# Altium PCB LED_Matrix.PcbDoc (part 2 of 2)
Units mil, origin at the board's own origin, x right, y up, seen from the top; angles counter-clockwise.
Board outline 11090 x 4405 mil, 2 copper layers (Top Layer, Bottom Layer); 184 components, 244 nets, 878 pads, 83 vias.
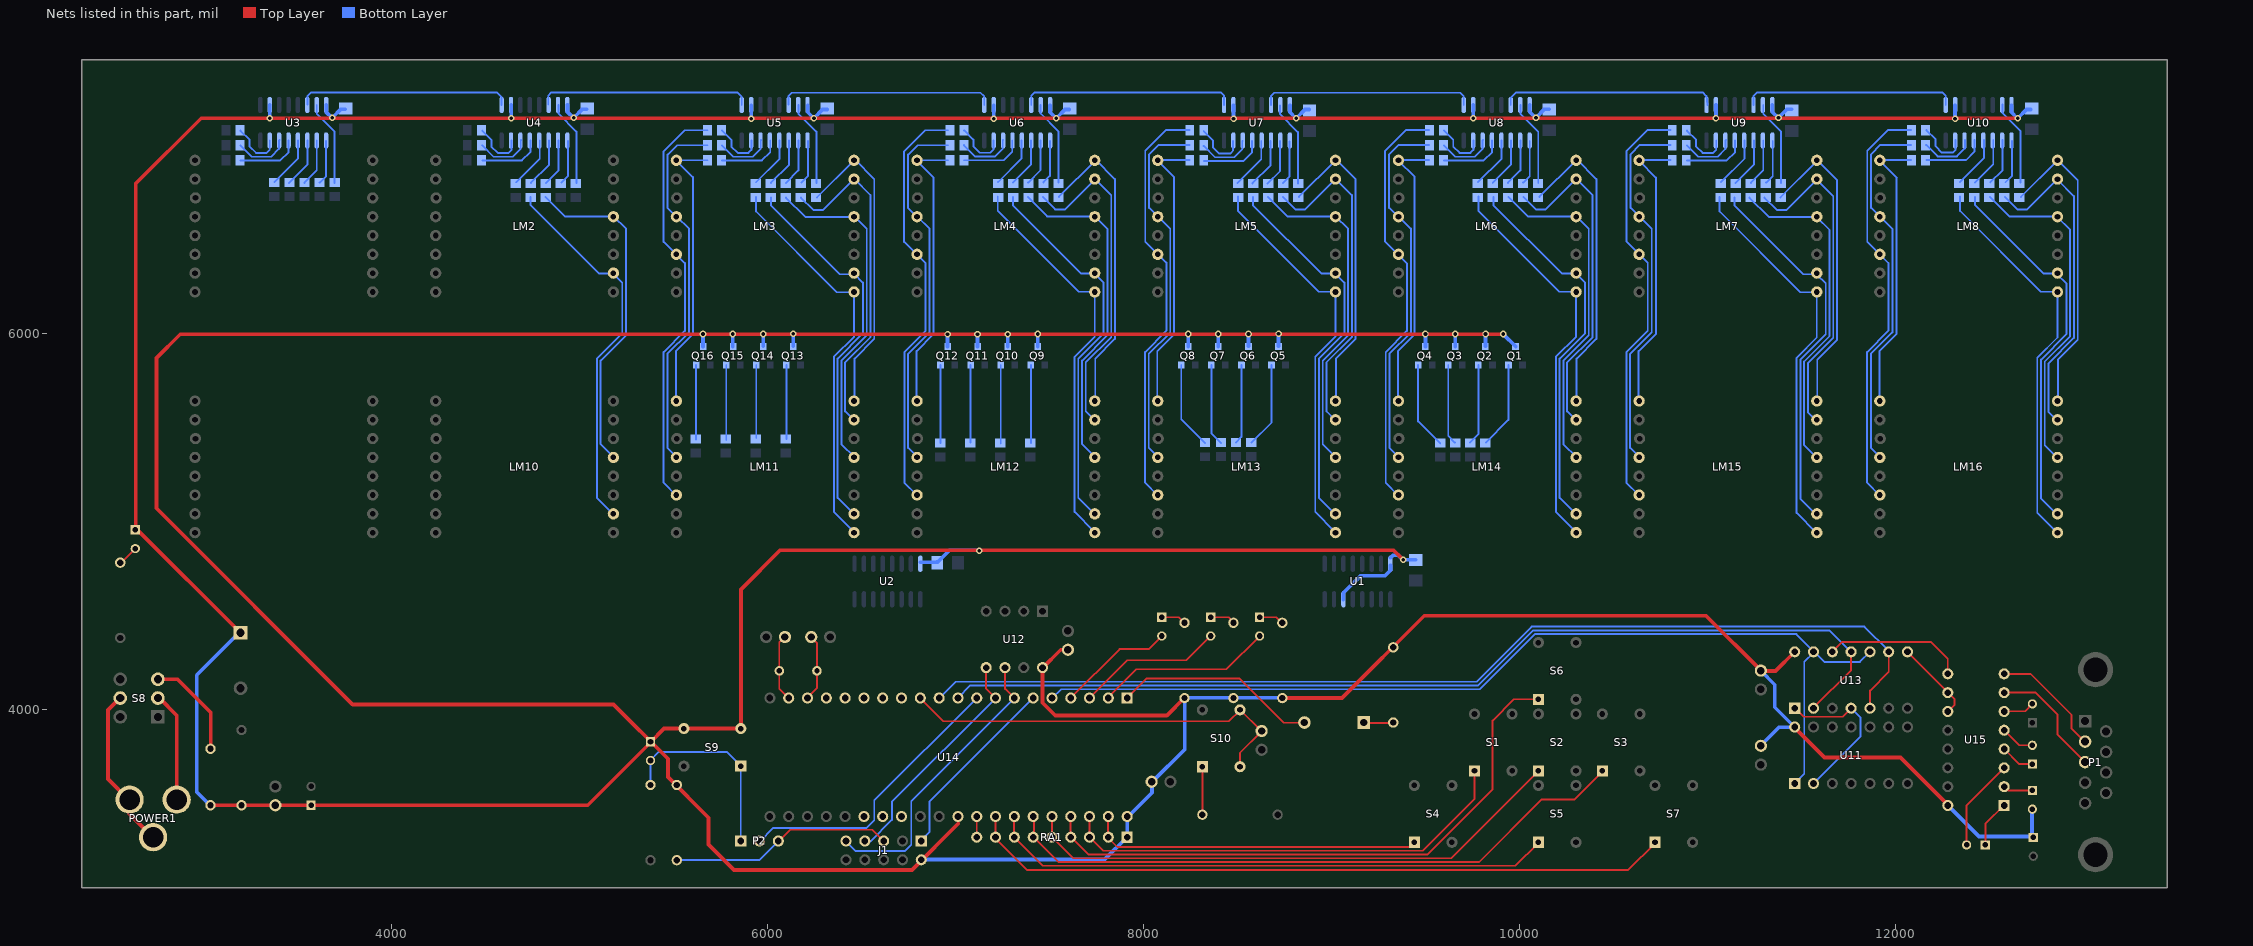
[diagram p2: the nets of this part, all layers, seen from the top]

## Via types
v1: diameter 35, hole 20, Top Layer to Bottom Layer, 79 vias
v2: diameter 314.96, hole 196.85, Top Layer to Bottom Layer, 4 vias

## Nets (pads, with @x,y where several pads share a name; then routed paths per layer and width w, separated by ;. In a path a pad name is that pad's centre, name@x,y a point inside that pad or via, vN(x,y) a via of type N, cw(c..) or ccw(c..) an arc to the next point about the centre after c; other vN are vias at no path point) (continued)
L15: LM2.2 LM10.2 R15.2 | length 2021.5
  Bottom Layer w10: R15.2@4742,6725 4742,6682 5107,6317 LM2.2@5181,6317 ; LM10.2@5180,5040 5095,5125 5095,5865 5230,6000 5230,6270 LM2.2@5182.52,6317.48
L16: LM2.5 LM10.5 R16.2 | length 1800
  Bottom Layer w10: R16.2@4821,6725 4924,6622 LM2.5@5183,6622 ; LM2.5@5182.52,6622.48 5250,6555 5250,5990 5115,5855 5115,5410 LM10.5@5185,5340
L17: LM3.9 LM11.9 R17.2 | length 1519.8
  Bottom Layer w10: LM11.9@5515,5640 5515,5905 5605,5995 5605,6831 ; LM3.9@5517,6921 5518,6920 R17.2@5684.6,6920 ; LM3.9@5517.64,6917.36 5605,6830
L18: LM3.14 LM11.14 R18.2 | length 2231.1
  Bottom Layer w10: LM11.14@5515,5140 5450,5205 5450,5900 5563,6013 5563,6373 5450,6486 5450,6968 5562,7080 R18.2@5684.6,7080 ; LM3.14@5517.64,6418.36 LM3.14@5517.64,6419.92
L19: LM3.8 LM11.8 R19.2 | length 1643.5
  Bottom Layer w10: R19.2@6265.5,6722.5 LM3.8@6461,6918 ; LM11.8@6465,5645 6465,5865 6570,5970 6570,6820 LM3.8@6465,6925
L20: LM3.12 LM11.12 R20.2 | length 1964.7
  Bottom Layer w10: LM3.12@5517.64,6619.92 5519.92,6619.92 5585,6554.84 5585,6005 5470,5890 5470,5390 LM11.12@5520,5340 ; LM3.12@5519,6617 5471,6665 5471,6950 5521,7000 R20.2@5684.6,7000
L21: LM3.1 LM11.1 R21.2 | length 2143.2
  Bottom Layer w10: R21.2@5941,6725 5941,6648 6371,6218 LM3.1@6463.52,6218 ; LM11.1@6460,4945 6355,5050 6355,5875 6462.52,5982.52 LM3.1@6462.52,6222.52
L22: LM3.7 LM11.7 R22.2 | length 1768.7
  Bottom Layer w10: R22.2@6180,6722 6246,6656 6299,6656 LM3.7@6461,6818 ; LM11.7@6460,5540 6415,5585 6415,5845 6550,5980 6550,6735 LM3.7@6462.52,6822.48
L23: LM3.2 LM11.2 R23.2 | length 2021.5
  Bottom Layer w10: R23.2@6021,6722 6021,6679 6386,6314 LM3.2@6460,6314 ; LM11.2@6460,5040 6375,5125 6375,5865 6510,6000 6510,6270 LM3.2@6462.52,6317.48
L24: LM3.5 LM11.5 R24.2 | length 1800
  Bottom Layer w10: R24.2@6100,6722 6203,6619 LM3.5@6462,6619 ; LM3.5@6462.52,6622.48 6530,6555 6530,5990 6395,5855 6395,5410 LM11.5@6465,5340
L25: LM4.9 LM12.9 R25.2 | length 1525.5
  Bottom Layer w10: LM12.9@6795,5640 6795,5905 6884.42,5994.42 6884.42,6828.58 6793,6920 R25.2@6963.6,6920
L26: LM4.14 LM12.14 R26.2 | length 2232.5
  Bottom Layer w10: LM12.14@6795,5140 6730,5205 6730,5900 6843,6013 6843,6372 6729,6486 6729,6968 6841,7080 R26.2@6963.6,7080 ; LM4.14@6797.64,6417.36 LM4.14@6797.64,6419.92
L27: LM4.8 LM12.8 R27.2 | length 1643.5
  Bottom Layer w10: R27.2@7551.5,6725.5 LM4.8@7747,6921 ; LM12.8@7745,5645 7745,5865 7850,5970 7850,6820 LM4.8@7745,6925
L28: LM4.12 LM12.12 R28.2 | length 1964.2
  Bottom Layer w10: LM4.12@6797.64,6619.92 6799.92,6619.92 6864.38,6555.47 6864.38,6004.38 6750,5890 6750,5390 LM12.12@6800,5340 ; LM4.12@6798,6617 6750,6665 6750,6950 6800,7000 R28.2@6963.6,7000
L29: LM4.1 LM12.1 R29.2 | length 2143.2
  Bottom Layer w10: R29.2@7227,6728 7227,6651 7657,6221 LM4.1@7749.52,6221 ; LM12.1@7740,4945 7635,5050 7635,5875 7742.52,5982.52 LM4.1@7742.52,6222.52
L30: LM4.7 LM12.7 R30.2 | length 1768.7
  Bottom Layer w10: R30.2@7466,6725 7532,6659 7585,6659 LM4.7@7747,6821 ; LM12.7@7740,5540 7695,5585 7695,5845 7830,5980 7830,6735 LM4.7@7742.52,6822.48
L31: LM4.2 LM12.2 R31.2 | length 2021.5
  Bottom Layer w10: R31.2@7307,6725 7307,6682 7672,6317 LM4.2@7746,6317 ; LM12.2@7740,5040 7655,5125 7655,5865 7790,6000 7790,6270 LM4.2@7742.52,6317.48
L32: LM4.5 LM12.5 R32.2 | length 1800
  Bottom Layer w10: R32.2@7386,6725 7489,6622 LM4.5@7748,6622 ; LM4.5@7742.52,6622.48 7810,6555 7810,5990 7675,5855 7675,5410 LM12.5@7745,5340
L33: LM5.9 LM13.9 R33.2 | length 1518.3
  Bottom Layer w10: LM13.9@8075,5640 8075,5905 8164.31,5994.31 8164.31,6830.69 LM5.9@8077.64,6917.36 ; LM5.9@8078,6923 8079,6922 R33.2@8245.6,6922
L34: LM5.14 LM13.14 R34.2 | length 2232.8
  Bottom Layer w10: LM13.14@8075,5140 8010,5205 8010,5900 8123.28,6013.28 8123.28,6375.72 8011,6488 8011,6970 8123,7082 R34.2@8245.6,7082 ; LM5.14@8077.64,6419.92 LM5.14@8079.08,6419.92
L35: LM5.8 LM13.8 R35.2 | length 1643.5
  Bottom Layer w10: R35.2@8828.5,6725.5 LM5.8@9024,6921 ; LM13.8@9025,5645 9025,5865 9130,5970 9130,6820 LM5.8@9025,6925
L36: LM5.12 LM13.12 R36.2 | length 1963.9
  Bottom Layer w10: LM5.12@8077.64,6619.92 8079.92,6619.92 8144.06,6555.78 8144.06,6004.06 8030,5890 8030,5390 LM13.12@8080,5340 ; LM5.12@8080,6619 8032,6667 8032,6952 8082,7002 R36.2@8245.6,7002
L37: LM5.1 LM13.1 R37.2 | length 2143.2
  Bottom Layer w10: R37.2@8504,6728 8504,6651 8934,6221 LM5.1@9026.52,6221 ; LM13.1@9020,4945 8915,5050 8915,5875 9022.52,5982.52 LM5.1@9022.52,6222.52
L38: LM5.7 LM13.7 R38.2 | length 1768.7
  Bottom Layer w10: R38.2@8743,6725 8809,6659 8862,6659 LM5.7@9024,6821 ; LM13.7@9020,5540 8975,5585 8975,5845 9110,5980 9110,6735 LM5.7@9022.52,6822.48
L39: LM5.2 LM13.2 R39.2 | length 2021.5
  Bottom Layer w10: R39.2@8584,6725 8584,6682 8949,6317 LM5.2@9023,6317 ; LM13.2@9020,5040 8935,5125 8935,5865 9070,6000 9070,6270 LM5.2@9022.52,6317.48
L40: LM5.5 LM13.5 R40.2 | length 1800
  Bottom Layer w10: R40.2@8663,6725 8766,6622 LM5.5@9025,6622 ; LM5.5@9022.52,6622.48 9090,6555 9090,5990 8955,5855 8955,5410 LM13.5@9025,5340
L41: LM6.9 LM14.9 R41.2 | length 1516.3
  Bottom Layer w10: LM14.9@9355,5640 9355,5905 9443.62,5993.62 9443.62,6831.38 LM6.9@9357.64,6917.36 ; LM6.9@9355,6922 R41.2@9521.6,6922
L42: LM6.14 LM14.14 R42.2 | length 2232.8
  Bottom Layer w10: LM14.14@9355,5140 9290,5205 9290,5900 9403,6013 9403,6372 9287,6488 9287,6970 9399,7082 R42.2@9521.6,7082
L43: LM6.8 LM14.8 R43.2 | length 1643.5
  Bottom Layer w10: R43.2@10107.5,6725.5 LM6.8@10303,6921 ; LM14.8@10305,5645 10305,5865 10410,5970 10410,6820 LM6.8@10305,6925
L44: LM6.12 LM14.12 R44.2 | length 1963.4
  Bottom Layer w10: LM6.12@9356,6619 9308,6667 9308,6952 9358,7002 R44.2@9521.6,7002 ; LM6.12@9357.64,6619.92 9359.92,6619.92 9423.44,6556.41 9423.44,6003.44 9310,5890 9310,5390 LM14.12@9360,5340
L45: LM6.1 LM14.1 R45.2 | length 2143.2
  Bottom Layer w10: R45.2@9783,6728 9783,6651 10213,6221 LM6.1@10305.52,6221 ; LM14.1@10300,4945 10195,5050 10195,5875 10302.52,5982.52 LM6.1@10302.52,6222.52
L46: LM6.7 LM14.7 R46.2 | length 1768.7
  Bottom Layer w10: R46.2@10022,6725 10088,6659 10141,6659 LM6.7@10303,6821 ; LM14.7@10300,5540 10255,5585 10255,5845 10390,5980 10390,6735 LM6.7@10302.52,6822.48
L47: LM6.2 LM14.2 R47.2 | length 2021.5
  Bottom Layer w10: R47.2@9863,6725 9863,6682 10228,6317 LM6.2@10302,6317 ; LM14.2@10300,5040 10215,5125 10215,5865 10350,6000 10350,6270 LM6.2@10302.52,6317.48
L48: LM6.5 LM14.5 R48.2 | length 1800
  Bottom Layer w10: R48.2@9942,6725 10045,6622 LM6.5@10304,6622 ; LM6.5@10302.52,6622.48 10370,6555 10370,5990 10235,5855 10235,5410 LM14.5@10305,5340
L49: LM7.9 LM15.9 R49.2 | length 1520.9
  Bottom Layer w10: LM15.9@10635,5640 10635,5905 10728,5998 10728,6828 ; LM7.9@10637.64,6917.36 10727,6828 ; LM7.9@10638,6923 10639,6922 R49.2@10805.6,6922
L50: LM7.14 LM15.14 R50.2 | length 2231.5
  Bottom Layer w10: LM15.14@10635,5140 10570,5205 10570,5900 10683.44,6013.44 10683.44,6375.56 10571,6488 10571,6970 10683,7082 R50.2@10805.6,7082
L51: LM7.8 LM15.8 R51.2 | length 1643.5
  Bottom Layer w10: R51.2@11389.5,6722.5 LM7.8@11585,6918 ; LM15.8@11585,5640 11585,5860 11690,5965 11690,6815 LM7.8@11585,6920
L52: LM7.12 LM15.12 R52.2 | length 1964.7
  Bottom Layer w10: LM7.12@10637.64,6619.92 10639.92,6619.92 10705.03,6554.81 10705.03,6005.03 10590,5890 10590,5390 LM15.12@10640,5340 ; LM7.12@10640,6619 10592,6667 10592,6952 10642,7002 R52.2@10805.6,7002
L53: LM7.1 LM15.1 R53.2 | length 2143.2
  Bottom Layer w10: R53.2@11065,6725 11065,6648 11495,6218 LM7.1@11587.52,6218 ; LM15.1@11580,4940 11475,5045 11475,5870 11582.52,5977.52 LM7.1@11582.52,6217.52
L54: LM7.7 LM15.7 R54.2 | length 1768.7
  Bottom Layer w10: R54.2@11304,6722 11370,6656 11423,6656 LM7.7@11585,6818 ; LM15.7@11580,5535 11535,5580 11535,5840 11670,5975 11670,6730 LM7.7@11582.52,6817.48
L55: LM7.2 LM15.2 R55.2 | length 2021.5
  Bottom Layer w10: R55.2@11145,6722 11145,6679 11510,6314 LM7.2@11584,6314 ; LM15.2@11580,5035 11495,5120 11495,5860 11630,5995 11630,6265 LM7.2@11582.52,6312.48
L56: LM7.5 LM15.5 R56.2 | length 1800
  Bottom Layer w10: R56.2@11224,6722 11327,6619 LM7.5@11586,6619 ; LM7.5@11582.52,6617.48 11650,6550 11650,5985 11515,5850 11515,5405 LM15.5@11585,5335
L57: LM8.9 LM16.9 R57.2 | length 1521.9
  Bottom Layer w10: LM16.9@11915,5640 11915,5905 12006.91,5996.91 12006.91,6828 ; LM8.9@11917,6923 11918,6922 R57.2@12084.6,6922 ; LM8.9@11917.64,6917.36 12008,6827
L58: LM8.14 LM16.14 R58.2 | length 2230.9
  Bottom Layer w10: LM16.14@11915,5140 11850,5205 11850,5900 11963.22,6013.22 11963.22,6373.78 11851,6486 11851,6971 11962,7082 R58.2@12084.6,7082
L59: LM8.8 LM16.8 R59.2 | length 1643.5
  Bottom Layer w10: R59.2@12668.5,6725.5 LM8.8@12864,6921 ; LM16.8@12865,5640 12865,5860 12970,5965 12970,6815 LM8.8@12865,6920
L60: LM8.12 LM16.12 R60.2 | length 1964.7
  Bottom Layer w10: LM8.12@11917.64,6619.92 11919.92,6619.92 11985,6554.84 11985,6005 11870,5890 11870,5390 LM16.12@11920,5340 ; LM8.12@11919,6619 11871,6667 11871,6952 11921,7002 R60.2@12084.6,7002
L61: LM8.1 LM16.1 R61.2 | length 2143.2
  Bottom Layer w10: R61.2@12344,6728 12344,6651 12774,6221 LM8.1@12866.52,6221 ; LM16.1@12860,4940 12755,5045 12755,5870 12862.52,5977.52 LM8.1@12862.52,6217.52
L62: LM8.7 LM16.7 R62.2 | length 1768.7
  Bottom Layer w10: R62.2@12583,6725 12649,6659 12702,6659 LM8.7@12864,6821 ; LM16.7@12860,5535 12815,5580 12815,5840 12950,5975 12950,6730 LM8.7@12862.52,6817.48
L63: LM8.2 LM16.2 R63.2 | length 2021.5
  Bottom Layer w10: R63.2@12424,6725 12424,6682 12789,6317 LM8.2@12863,6317 ; LM16.2@12860,5035 12775,5120 12775,5860 12910,5995 12910,6265 LM8.2@12862.52,6312.48
L64: LM8.5 LM16.5 R64.2 | length 1800
  Bottom Layer w10: R64.2@12503,6725 12606,6622 LM8.5@12865,6622 ; LM8.5@12862.52,6617.48 12930,6550 12930,5985 12795,5850 12795,5405 LM16.5@12865,5335
NetB1_1: B1.1 R84.1 | length 159
  Top Layer w10: B1.1@9175,3928 R84.1@9334,3928
NetC15_1: C15.1 U15.2 | length 159.3
  Top Layer w10: U15.2@12578,3589 12598,3569 C15.1@12729,3569
NetC16_1: C16.1 U15.1 | length 252
  Top Layer w10: C16.1@12479,3279 12479,3391 U15.1@12578,3490
NetC16_2: C16.2 U15.3 | length 494.3
  Top Layer w10: C16.2@12379,3279 12379,3489 U15.3@12580,3690
NetC17_1: C17.1 U15.4 | length 184.6
  Top Layer w10: U15.4@12578,3790 12659,3709 C17.1@12729,3709
NetC17_2: C17.2 U15.5 | length 186
  Top Layer w10: U15.5@12577,3891 12659,3809 C17.2@12729,3809
NetC18_2: C18.2 U15.6 | length 168.2
  Top Layer w10: U15.6@12577,3990 12690,3990 C18.2@12729,4029
NetC21_2: C21.2 P2.1 R87.2 S9.1 | length 1062.3
  Bottom Layer w10: R87.2@5380,3595 5380,3730 5424,3774 5785,3774 5860,3699 P2.1@5860,3301
NetC24_2: C24.2 U14.18 Y1.2 | length 358
  Top Layer w10: U14.18@6214,4061 6265,4112 6265,4354 C24.2@6234,4385
NetC25_2: C25.2 U14.19 Y1.1 | length 358.7
  Top Layer w10: C25.2@6093,4385 6065,4357 6065,4110 U14.19@6116,4059
NetDS1_1: DS1.1 R81.1 | length 134.3
  Top Layer w10: DS1.1@8619,4490 8708,4490 R81.1@8740,4458
NetDS2_1: DS2.1 R82.1 | length 133.2
  Top Layer w10: DS2.1@8359,4490 8454,4490 R82.1@8481,4463
NetDS3_1: DS3.1 R83.1 | length 132
  Top Layer w10: DS3.1@8099,4490 8190,4490 R83.1@8219,4461
NetDS4_2: DS4.2 R88.1 | length 106.1
  Top Layer w10: R88.1@2565,4780 DS4.2@2640,4855
NetF1_1: F1.1 S8.3 | length 549.9
  Top Layer w20: S8.3@2760,4160 2865,4160 3041,3984 F1.1@3041,3788
NetPOWER1_1: POWER1.1 S8.1 | length 594.5
  Top Layer w20: S8.1@2760,4060 2768,4060 2861,3967 POWER1.1@2861,3512
NetPOWER1_2: POWER1.2 S8.4 | length 879.7
  Top Layer w20: S8.4@2560,4060 2558,4060 2495,3997 2495,3629 POWER1.2@2610,3514 ; POWER1.2@2609,3521 2609,3444 POWER1.2@2737,3316
NetQ1_2: Q1.2 R65.2 | length 461.7
  Bottom Layer w10: R65.2@9822,5419 9942.6,5539.6 Q1.2@9942.6,5830.79
NetQ2_2: Q2.2 R66.2 | length 430.3
  Bottom Layer w10: R66.2@9738,5419 9782.6,5463.6 Q2.2@9782.6,5830.79
NetQ3_2: Q3.2 R67.2 | length 426.5
  Bottom Layer w10: Q3.2@9622.6,5830.79 9622.6,5454.4 R67.2@9658,5419
NetQ4_2: Q4.2 R68.2 | length 465.4
  Bottom Layer w10: Q4.2@9462.6,5830.79 9462.6,5531.4 R68.2@9580,5414
NetQ5_2: Q5.2 R69.2 | length 455.9
  Bottom Layer w10: R69.2@8576,5419 8682.6,5525.6 Q5.2@8682.6,5830.79
NetQ6_2: Q6.2 R70.2 | length 424
  Bottom Layer w10: R70.2@8493,5419 8522.6,5448.6 Q6.2@8522.6,5830.79
NetQ7_2: Q7.2 R71.2 | length 437.5
  Bottom Layer w10: Q7.2@8362.6,5830.79 8362.6,5467.4 R71.2@8415,5415
NetQ8_2: Q8.2 R72.2 | length 465.7
  Bottom Layer w10: Q8.2@8202.6,5830.79 8202.6,5542.4 R72.2@8328,5417
NetQ9_2: Q9.2 R73.2 | length 415.2
  Bottom Layer w10: R73.2@7402.6,5415.6 Q9.2@7402.6,5830.79
NetQ10_2: Q10.2 R74.2 | length 416.2
  Bottom Layer w10: R74.2@7242.6,5414.6 Q10.2@7242.6,5830.79
NetQ11_2: Q11.2 R75.2 | length 413.2
  Bottom Layer w10: R75.2@7082.6,5417.6 Q11.2@7082.6,5830.79
NetQ12_2: Q12.2 R76.2 | length 414.4
  Bottom Layer w10: R76.2@6922.6,5416.4 Q12.2@6922.6,5830.79
NetQ13_2: Q13.2 R77.2 | length 392.4
  Bottom Layer w10: R77.2@6102.6,5438.4 Q13.2@6102.6,5830.79
NetQ14_2: Q14.2 R78.2 | length 387.2
  Bottom Layer w10: R78.2@5942.6,5443.6 Q14.2@5942.6,5830.79
NetQ15_2: Q15.2 R79.2 | length 398.2
  Bottom Layer w10: R79.2@5782.6,5432.6 Q15.2@5782.6,5830.79
NetQ16_2: Q16.2 R80.2 | length 396.4
  Bottom Layer w10: R80.2@5622.6,5434.4 Q16.2@5622.6,5830.79
NetR1_1: R1.1 U3.5 | length 336.2
  Bottom Layer w10: R1.1@3199,6919 3410,6919 3455,6964 U3.5@3455,7025.51
NetR2_1: R2.1 U3.7 | length 284.5
  Bottom Layer w10: R2.1@3199,7079 3199,7078 3248,7029 3248,6993 3282,6959 3339,6959 3355,6975 U3.7@3355,7025.51
NetR3_1: R3.1 U3.15 | length 453.8
  Bottom Layer w10: U3.15@3605,7214.49 3605,7168 3700,7073 R3.1@3700,6800
NetR4_1: R4.1 U3.6 | length 295.5
  Bottom Layer w10: R4.1@3198,7000 3259,6939 3362,6939 3404,6981 3404,7025 U3.6@3406,7027
NetR5_1: R5.1 U3.4 | length 274.7
  Bottom Layer w10: R5.1@3379,6803 3505,6929 U3.4@3505,7025.51
NetR6_1: R6.1 U3.1 | length 235.5
  Bottom Layer w10: R6.1@3620,6801 3655,6836 U3.1@3655,7022
NetR7_1: R7.1 U3.3 | length 265.7
  Bottom Layer w10: R7.1@3458,6800 3555,6897 U3.3@3555,7025.51
NetR8_1: R8.1 U3.2 | length 252.8
  Bottom Layer w10: R8.1@3539,6800 3605,6866 U3.2@3605,7025.51
NetR9_1: R9.1 U4.5 | length 336.2
  Bottom Layer w10: R9.1@4485,6919 4696,6919 4741,6964 U4.5@4741,7025.51
NetR10_1: R10.1 U4.7 | length 284.5
  Bottom Layer w10: R10.1@4485,7079 4485,7078 4534,7029 4534,6993 4568,6959 4625,6959 4641,6975 U4.7@4641,7025.51
NetR11_1: R11.1 U4.15 | length 453.8
  Bottom Layer w10: U4.15@4891,7214.49 4891,7168 4986,7073 R11.1@4986,6800
NetR12_1: R12.1 U4.6 | length 295.5
  Bottom Layer w10: R12.1@4484,7000 4545,6939 4648,6939 4690,6981 4690,7025 U4.6@4692,7027
NetR13_1: R13.1 U4.4 | length 274.7
  Bottom Layer w10: R13.1@4665,6803 4791,6929 U4.4@4791,7025.51
NetR14_1: R14.1 U4.1 | length 235.5
  Bottom Layer w10: R14.1@4906,6801 4941,6836 U4.1@4941,7022
NetR15_1: R15.1 U4.3 | length 265.7
  Bottom Layer w10: R15.1@4744,6800 4841,6897 U4.3@4841,7025.51
NetR16_1: R16.1 U4.2 | length 252.8
  Bottom Layer w10: R16.1@4825,6800 4891,6866 U4.2@4891,7025.51
NetR17_1: R17.1 U5.5 | length 336.2
  Bottom Layer w10: R17.1@5761,6919 5972,6919 6017,6964 U5.5@6017,7025.51
NetR18_1: R18.1 U5.7 | length 284.5
  Bottom Layer w10: R18.1@5761,7079 5761,7078 5810,7029 5810,6993 5844,6959 5901,6959 5917,6975 U5.7@5917,7025.51
NetR19_1: R19.1 U5.15 | length 453.8
  Bottom Layer w10: U5.15@6167,7214.49 6167,7168 6262,7073 R19.1@6262,6800
NetR20_1: R20.1 U5.6 | length 295.5
  Bottom Layer w10: R20.1@5760,7000 5821,6939 5924,6939 5966,6981 5966,7025 U5.6@5968,7027
NetR21_1: R21.1 U5.4 | length 274.7
  Bottom Layer w10: R21.1@5941,6803 6067,6929 U5.4@6067,7025.51
NetR22_1: R22.1 U5.1 | length 235.5
  Bottom Layer w10: R22.1@6182,6801 6217,6836 U5.1@6217,7022
NetR23_1: R23.1 U5.3 | length 265.7
  Bottom Layer w10: R23.1@6020,6800 6117,6897 U5.3@6117,7025.51
NetR24_1: R24.1 U5.2 | length 252.8
  Bottom Layer w10: R24.1@6101,6800 6167,6866 U5.2@6167,7025.51
NetR25_1: R25.1 U6.5 | length 336.2
  Bottom Layer w10: R25.1@7048,6920 7259,6920 7304,6965 U6.5@7304,7026.51
NetR26_1: R26.1 U6.7 | length 284.5
  Bottom Layer w10: R26.1@7048,7080 7048,7079 7097,7030 7097,6994 7131,6960 7188,6960 7204,6976 U6.7@7204,7026.51
NetR27_1: R27.1 U6.15 | length 453.8
  Bottom Layer w10: U6.15@7454,7215.49 7454,7169 7549,7074 R27.1@7549,6801
NetR28_1: R28.1 U6.6 | length 295.5
  Bottom Layer w10: R28.1@7047,7001 7108,6940 7211,6940 7253,6982 7253,7026 U6.6@7255,7028
NetR29_1: R29.1 U6.4 | length 274.7
  Bottom Layer w10: R29.1@7228,6804 7354,6930 U6.4@7354,7026.51
NetR30_1: R30.1 U6.1 | length 235.5
  Bottom Layer w10: R30.1@7469,6802 7504,6837 U6.1@7504,7023
NetR31_1: R31.1 U6.3 | length 265.7
  Bottom Layer w10: R31.1@7307,6801 7404,6898 U6.3@7404,7026.51
NetR32_1: R32.1 U6.2 | length 252.8
  Bottom Layer w10: R32.1@7388,6801 7454,6867 U6.2@7454,7026.51
NetR33_1: R33.1 U7.5 | length 336.2
  Bottom Layer w10: R33.1@8322,6916 8533,6916 8578,6961 U7.5@8578,7022.51
NetR34_1: R34.1 U7.7 | length 284.5
  Bottom Layer w10: R34.1@8322,7076 8322,7075 8371,7026 8371,6990 8405,6956 8462,6956 8478,6972 U7.7@8478,7022.51
NetR35_1: R35.1 U7.15 | length 453.8
  Bottom Layer w10: U7.15@8728,7211.49 8728,7165 8823,7070 R35.1@8823,6797
NetR36_1: R36.1 U7.6 | length 295.5
  Bottom Layer w10: R36.1@8321,6997 8382,6936 8485,6936 8527,6978 8527,7022 U7.6@8529,7024
NetR37_1: R37.1 U7.4 | length 274.7
  Bottom Layer w10: R37.1@8502,6800 8628,6926 U7.4@8628,7022.51
NetR38_1: R38.1 U7.1 | length 235.5
  Bottom Layer w10: R38.1@8743,6798 8778,6833 U7.1@8778,7019
NetR39_1: R39.1 U7.3 | length 265.7
  Bottom Layer w10: R39.1@8581,6797 8678,6894 U7.3@8678,7022.51
NetR40_1: R40.1 U7.2 | length 252.8
  Bottom Layer w10: R40.1@8662,6797 8728,6863 U7.2@8728,7022.51
NetR41_1: R41.1 U8.5 | length 336.2
  Bottom Layer w10: R41.1@9600,6919 9811,6919 9856,6964 U8.5@9856,7025.51
NetR42_1: R42.1 U8.7 | length 284.5
  Bottom Layer w10: R42.1@9600,7079 9600,7078 9649,7029 9649,6993 9683,6959 9740,6959 9756,6975 U8.7@9756,7025.51
NetR43_1: R43.1 U8.15 | length 453.8
  Bottom Layer w10: U8.15@10006,7214.49 10006,7168 10101,7073 R43.1@10101,6800
NetR44_1: R44.1 U8.6 | length 295.5
  Bottom Layer w10: R44.1@9599,7000 9660,6939 9763,6939 9805,6981 9805,7025 U8.6@9807,7027
NetR45_1: R45.1 U8.4 | length 274.7
  Bottom Layer w10: R45.1@9780,6803 9906,6929 U8.4@9906,7025.51
NetR46_1: R46.1 U8.1 | length 235.5
  Bottom Layer w10: R46.1@10021,6801 10056,6836 U8.1@10056,7022
NetR47_1: R47.1 U8.3 | length 265.7
  Bottom Layer w10: R47.1@9859,6800 9956,6897 U8.3@9956,7025.51
NetR48_1: R48.1 U8.2 | length 252.8
  Bottom Layer w10: R48.1@9940,6800 10006,6866 U8.2@10006,7025.51
NetR49_1: R49.1 U9.5 | length 336.2
  Bottom Layer w10: R49.1@10892,6919 11103,6919 11148,6964 U9.5@11148,7025.51
NetR50_1: R50.1 U9.7 | length 284.5
  Bottom Layer w10: R50.1@10892,7079 10892,7078 10941,7029 10941,6993 10975,6959 11032,6959 11048,6975 U9.7@11048,7025.51
NetR51_1: R51.1 U9.15 | length 453.8
  Bottom Layer w10: U9.15@11298,7214.49 11298,7168 11393,7073 R51.1@11393,6800
NetR52_1: R52.1 U9.6 | length 295.5
  Bottom Layer w10: R52.1@10891,7000 10952,6939 11055,6939 11097,6981 11097,7025 U9.6@11099,7027
NetR53_1: R53.1 U9.4 | length 274.7
  Bottom Layer w10: R53.1@11072,6803 11198,6929 U9.4@11198,7025.51
NetR54_1: R54.1 U9.1 | length 235.5
  Bottom Layer w10: R54.1@11313,6801 11348,6836 U9.1@11348,7022
NetR55_1: R55.1 U9.3 | length 265.7
  Bottom Layer w10: R55.1@11151,6800 11248,6897 U9.3@11248,7025.51
NetR56_1: R56.1 U9.2 | length 252.8
  Bottom Layer w10: R56.1@11232,6800 11298,6866 U9.2@11298,7025.51
NetR57_1: R57.1 U10.5 | length 336.2
  Bottom Layer w10: R57.1@12165,6921 12376,6921 12421,6966 U10.5@12421,7027.51
NetR58_1: R58.1 U10.7 | length 284.5
  Bottom Layer w10: R58.1@12165,7081 12165,7080 12214,7031 12214,6995 12248,6961 12305,6961 12321,6977 U10.7@12321,7027.51
NetR59_1: R59.1 U10.15 | length 453.8
  Bottom Layer w10: U10.15@12571,7216.49 12571,7170 12666,7075 R59.1@12666,6802
NetR60_1: R60.1 U10.6 | length 295.5
  Bottom Layer w10: R60.1@12164,7002 12225,6941 12328,6941 12370,6983 12370,7027 U10.6@12372,7029
NetR61_1: R61.1 U10.4 | length 274.7
  Bottom Layer w10: R61.1@12345,6805 12471,6931 U10.4@12471,7027.51
NetR62_1: R62.1 U10.1 | length 235.5
  Bottom Layer w10: R62.1@12586,6803 12621,6838 U10.1@12621,7024
NetR63_1: R63.1 U10.3 | length 265.7
  Bottom Layer w10: R63.1@12424,6802 12521,6899 U10.3@12521,7027.51
NetR64_1: R64.1 U10.2 | length 252.8
  Bottom Layer w10: R64.1@12505,6802 12571,6868 U10.2@12571,7027.51
NetR86_1: R86.1 S10.1 | length 257
  Top Layer w10: R86.1@8315,3438 S10.1@8315,3695
NetU3_14: U3.14 U4.9 | length 1138.5
  Bottom Layer w10: U3.14@3556,7216.49 3556,7263 3573,7280 4564,7280 4588,7256 U4.9@4588,7213
NetU4_14: U4.14 U5.9 | length 1136.1
  Bottom Layer w10: U4.14@4836,7217.49 4836,7264 4853,7281 5842,7281 5865,7258 U5.9@5865,7214
NetU5_14: U5.14 U6.9 | length 1149.7
  Bottom Layer w10: U5.14@6114,7215.49 6114,7262 6131,7279 7135,7279 7151,7263 7155,7263 U6.9@7155,7214.49
NetU6_14: U6.14 U7.9 | length 1136.4
  Bottom Layer w10: U6.14@7405,7215 7405,7263 7423,7281 8412,7281 8430,7263 U7.9@8430,7214.49
NetU7_14: U7.14 U8.9 | length 1134.7
  Bottom Layer w10: U7.14@8680,7214.49 8680,7262 8697,7279 9687,7279 9703,7263 9705,7263 U8.9@9705,7214.49
NetU8_14: U8.14 U9.9 | length 1146.2
  Bottom Layer w10: U8.14@9955,7214.49 9955,7252 9984,7281 10975,7281 10993,7263 10996,7263 U9.9@11001,7215.01
NetU9_14: U9.14 U10.9 | length 1133.3
  Bottom Layer w10: U9.14@11246,7214.49 11246,7262 11265,7281 12250,7281 12268,7263 U10.9@12268,7214.49
NetU11_2: U11.2 U13.1 U13.4 | length 860.7
  Top Layer w10: U13.1@11465,4006 11468,4006 11513,3961 11720,3961 U13.4@11765,4006 U13.4@11766,4006
  Bottom Layer w10: U11.2@11566,3607 11815,3856 11815,3956 11766,4005 U13.4@11765,4005
NetU13_8: U13.8 U15.10 U15.11 | length 435.6
  Top Layer w10: U13.8@12063.5,4305.5 12315,4054 12315,4025 U15.11@12279,3989
P00: RA1.2 S4.1 U14.39 | length 1768.9
  Top Layer w10: U14.39@7813,3427.08 7813,3317 7862,3268 9419,3268 S4.1@9442,3291
P01: RA1.3 S1.1 U14.38 | length 2450.8
  Top Layer w10: RA1.3@7714,3320 U14.38@7714,3430.08 ; RA1.3@7716,3319 7787,3248 9487,3248 9763,3524 S1.1@9763,3674
P02: RA1.4 S6.1 U14.37 | length 3196.8
  Top Layer w10: RA1.4@7613,3325 7710,3228 9512,3228 9858,3574 9858,3940 9972,4054 S6.1@10103,4054 ; RA1.4@7614,3320 U14.37@7614,3430.08
P03: RA1.5 S2.1 U14.36 | length 2938.8
  Top Layer w10: RA1.5@7514,3318 7515,3319 U14.36@7515,3430.08 ; RA1.5@7514,3322 7628,3208 9639,3208 S2.1@10101.5,3670.5
P04: RA1.6 S3.1 U14.35 | length 3390.2
  Top Layer w10: RA1.6@7415,3318 7420,3318 7550,3188 9786,3188 10118,3520 10293,3520 S3.1@10442,3669 ; RA1.6@7419,3318 U14.35@7419,3428.08
P05: RA1.7 S5.1 U14.34 | length 3008.7
  Top Layer w10: RA1.7@7314,3317 U14.34@7314,3427.08 ; RA1.7@7315,3320 7315,3319 7466,3168 9979,3168 S5.1@10100,3289
P06: RA1.8 S7.1 U14.33 | length 3753.5
  Top Layer w10: U14.33@7215,3430.08 7215,3313 7382,3146 10580,3146 S7.1@10723,3289
P07: RA1.9 U14.32 | length 110.1
  Top Layer w10: RA1.9@7115,3320 U14.32@7115,3430.08
P10: B1.2 U14.1 | length 1086.1
  Top Layer w10: U14.1@7912,4058 8019,4165 8511,4165 8747,3929 B1.2@8856,3929
P11: DS1.2 U14.2 | length 938.6
  Top Layer w10: U14.2@7815,4064 7964,4213 8443,4213 DS1.2@8619,4389
P12: DS2.2 U14.3 | length 776.9
  Top Layer w10: U14.3@7716,4061 7916,4261 8229,4261 DS2.2@8357,4389
P13: DS3.2 U14.4 | length 619.3
  Top Layer w10: U14.4@7616,4061 7875,4320 8029,4320 DS3.2@8099,4390
P14: U11.1 U13.10 U13.13 U14.5 | length 5316.8
  Bottom Layer w10: U14.5@7515,4058 7564,4107 9790.5,4107 10083.5,4400 11474,4400 11622,4252 11812,4252 U13.10@11865,4305 ; U11.1@11464,3606 11516,3658 11516,4252 11565,4301 U13.13@11565,4306
P15: J1.1 U14.6 | length 1003.5
  Bottom Layer w10: J1.1@6818,3303 6864,3349 6864,3511 U14.6@7413,4060
P16: J1.9 U12.6 U14.7 | length 1568.3
  Top Layer w10: U12.6@7266,4219 7266,4109 U14.7@7314,4061
  Bottom Layer w10: J1.9@6419,3298 6470,3247 6735,3247 6767,3279 6767,3512 U14.7@7315,4060
P17: J1.7 U12.5 U14.8 | length 1255.4
  Top Layer w10: U12.5@7164,4224 7164,4111 U14.8@7216,4059
  Bottom Layer w10: J1.7@6519,3297 6549,3297 6664,3412 6664,3509 U14.8@7215,4060
P25: U14.26
P26: U14.27
P27: U14.28
P32: C22.1 S10.2 U14.12 | length 2178.7
  Top Layer w10: U14.12@6812,4062 6937,3937 8456,3937 S10.2@8515.5,3996.5 ; S10.2@8515,3693 8515,3769 C22.1@8630.5,3884.5 ; S10.2@8515,3998 8515,3997 C22.1@8627,3885
P33: U14.13
P34: U14.14
P35: U14.15
P36: U14.16
P37: U14.17
R2IN: P1.2 U15.8 | length 620.7
  Top Layer w10: U15.8@12579,4189 12719,4189 12938,3970 12938,3898 P1.2@13008,3828
R2OUT: U13.12 U15.9 | length 752.2
  Top Layer w10: U13.12@11665,4307 11717,4359 12188,4359 12279,4268 U15.9@12279,4189
RST: P2.2 U14.9 | length 1531.6
  Bottom Layer w10: P2.2@5960,3297 6033,3370 6529,3370 6570,3411 6570,3516 U14.9@7114,4060
RST2: J1.5 P2.3 R85.2 | length 1194.6
  Top Layer w10: P2.3@6061,3298 6123,3360 6560,3360 J1.5@6621,3299
  Bottom Layer w10: R85.2@5520,3198 5958,3198 P2.3@6061,3301
RXD: U13.2 U13.11 U14.10 | length 5330
  Top Layer w10: U13.2@11564,4008 11765,4209 U13.11@11765,4306
  Bottom Layer w10: U14.10@7013,4059 7081,4127 9782,4127 10075,4420 11649,4420 11763,4306 U13.11@11765,4306
T2OUT: P1.3 U15.7 | length 648.2
  Top Layer w10: U15.7@12579,4089 12578,4090 12744,4090 12863,3971 12863,3865 P1.3@13009,3719
TXD: U13.5 U13.9 U14.11 | length 5606.7
  Top Layer w10: U13.5@11866,4007 11866,4100 11965,4199 U13.9@11965,4306
  Bottom Layer w10: U14.11@6915,4058 7004,4147 9773,4147 10066,4440 11836,4440 11965,4311 U13.9@11965,4306
VCC: C1.2 C2.2 C3.2 C4.2 C5.2 C6.2 C7.2 C8.2 C9.2 C10.2 C11.1 C12.1 C13.1 C14.1 C15.2 C19.1 C20.1 C21.1 C23.1 C26.1 D1.2 DS4.1 F1.2 J1.2 Q1.3 Q2.3 Q3.3 Q4.3 Q5.3 Q6.3 Q7.3 Q8.3 Q9.3 Q10.3 Q11.3 Q12.3 Q13.3 Q14.3 Q15.3 Q16.3 R81.2 R82.2 R83.2 R84.2 R85.1 RA1.1 S9.2 U1.6 U1.16 U2.16 U3.10 U3.16 U4.10 U4.16 U5.10 U5.16 U6.10 U6.16 U7.10 U7.16 U8.10 U8.16 U9.10 U9.16 U10.10 U10.16 U11.14 U12.8 U13.14 U14.31 U14.40 U15.16 | length 47388.2
  Top Layer w20: DS4.1@2643,4963 2643,6796 2990.75,7143.75 v1@12651,7143.75 ; DS4.1@2644.5,4962.5 C11.1@3200,4407 ; F1.2@3040,3490 5046,3490 5381,3825 C21.1@5381,3829 ; C21.1@5381,3827 5452,3898 S9.2@5860,3898 ; S9.2@5861,3899 5861,4638 6069,4846 9331,4846 v1@9383,4794 ; 7017,3393 6770,3146 5824,3146 5689,3281 5689,3424 5473,3640 5473,3737 5184,4026 3796,4026 2753,5069 2753,5869 2879,5995 v1@9916,5995 ; U12.8@7465,4220 7562,4317 C14.1@7600,4317 ; U12.8@7465,4224 7465,4035 7532,3968 8126,3968 R83.2@8220,4062 ; R81.2@8740,4060 9057,4060 9495,4498 10994,4498 11288,4204 11363,4204 U13.14@11465,4306 ; U11.14@11464,3903 11623,3744 12027,3744 U15.16@12280,3491
  Bottom Layer w20: F1.2@3040,3487 2967,3560 2967,4182 C11.1@3192,4407 ; v1(3355,7143) U3.10@3355,7214.49 ; U3.16@3655,7214.49 3655,7177 v1@3686,7146 ; v1(3688,7146) 3734,7192 C3.2@3757,7192 ; v1(4639,7143) U4.10@4639,7214.49 ; U4.16@4939,7214.49 4939,7177 v1@4970,7146 ; v1(4972,7146) 5018,7192 C4.2@5041,7192 ; Q16.3@5659,5930 v1(5659,5996) ; Q15.3@5818,5930 v1(5818,5996) ; v1(5916,7141) U5.10@5916,7212.49 ; Q14.3@5979,5931 v1(5979,5996) ; Q13.3@6139,5931 v1(6139,5997) ; U5.16@6216,7212.49 6216,7175 v1@6247,7144 ; v1(6249,7144) 6295,7190 C5.2@6318,7190 ; U2.16@6815,4782 C1.2@6906,4782 ; J1.2@6820,3201 7795,3201 7915,3321 7915,3425 8047,3557 8047,3613 8221,3787 R83.2@8221,4061 ; C1.2@6903,4784 6908,4784 6970,4846 v1@7128,4846 ; Q12.3@6960,5929 v1(6960,5995) ; Q11.3@7119,5929 v1(7119,5995) ; v1(7205,7141) U6.10@7205,7212.49 ; Q10.3@7280,5930 v1(7280,5995) ; Q9.3@7440,5930 v1(7440,5996) ; U12.8@7465,4218 U12.8@7465,4221 ; U6.16@7505,7212.49 7505,7175 v1@7536,7144 ; v1(7538,7144) 7584,7190 C6.2@7607,7190 ; R83.2@8221,4059 8224,4062 R81.2@8737,4062 ; Q8.3@8240,5930 v1(8240,5996) ; Q7.3@8399,5930 v1(8399,5996) ; v1(8481,7141) U7.10@8481,7212.49 ; Q6.3@8560,5931 v1(8560,5996) ; Q5.3@8720,5931 v1(8720,5997) ; U7.16@8781,7212.49 8781,7175 v1@8812,7144 ; v1(8814,7144) 8860,7190 C7.2@8883,7190 ; U1.6@9064,4584 9064,4618 9156,4710 9285,4710 9315,4740 U1.16@9315,4766 ; U1.16@9316,4806 9329,4819 9358,4819 v1@9382,4795 ; v1(9383,4795) C2.2@9450,4795 ; Q4.3@9501,5930 v1(9501,5996) ; Q3.3@9660,5930 v1(9660,5996) ; v1(9756,7143) U8.10@9756,7214.49 ; Q2.3@9821,5931 v1(9821,5996) ; v1@9914,5997 9981,5930 Q1.3@9981,5931 ; U8.16@10056,7214.49 10056,7177 v1@10087,7146 ; v1(10089,7146) 10135,7192 C8.2@10158,7192 ; v1(11046,7143) U9.10@11046,7214.49 ; C12.1@11284,3808 11381,3905 U11.14@11464,3905 ; C13.1@11284,4206 11359,4131 11359,4011 U11.14@11465,3905 ; U9.16@11346,7214.49 11346,7177 v1@11377,7146 ; v1(11379,7146) 11425,7192 C9.2@11448,7192 ; U15.16@12279,3489 12280,3489 12445.39,3323.61 12726.39,3323.61 12727,3324.21 C15.2@12727,3471 ; v1(12318,7141) U10.10@12318,7212.49 ; U10.16@12618,7212.49 12618,7175 v1@12649,7144 ; v1(12651,7144) 12697,7190 C10.2@12720,7190
  other v1: 7128,4844 9915,5996
pads on no net: J1.3 P1.1 P1.4 P1.6 P1.7 P1.8 P1.9 P1.10 P1.11 S1. S2. S3. S4. S5. S6. S7. S8.2 S8.5 S9. S10. U3.9 U11.3 U11.4 U11.5 U11.6 U11.8 U11.9 U11.10 U11.11 U11.12 U11.13 U14.29 U14.30 U15.12 U15.14
copper on no net:
  other v2: 3895,3300 11900,3300 2595,7195 13195,7205

## Polygon pours and split planes (outlines as drawn)
no net on Top Layer "GND" (solid, remove dead copper): 2803,7401 13018,7401 13018,7128 13062,7084 13125,7021 13390,7021 13390,3107 13387,3104 12276,3104 12276,3228 12000,3504 11998,3506 11879,3506 11759,3506 11636,3383 11485,3232 11485,3109 5274,3109 5272,3107 5184,3195 5184,4390 5184,4448 5006,4626 4992,4640 2762,4640 2619,4640 2414,4845 2414,6996 2677,6996 2762,7081 2803,7122 2803,7401
GND on Bottom Layer "GND" (solid, remove dead copper): 2803,7401 13018,7401 13018,7128 13062,7084 13125,7021 13390,7021 13390,3107 13387,3104 12276,3104 12276,3228 12000,3504 11998,3506 11879,3506 11759,3506 11636,3383 11485,3232 11485,3109 5274,3109 5272,3107 5184,3195 5184,4390 5184,4448 5006,4626 4992,4640 2762,4640 2619,4640 2414,4845 2414,6996 2677,6996 2762,7081 2803,7122 2803,7401

## Keep-outs
Keep-Out Layer:
  lines w11.81: 2415,3110 13390,3110 13390,7400 2415,7400 2415,3110

## Silkscreen, mask and mechanical layers (free items; w line width, h text height)
Drill Drawing:
  text "Seed Class 2008" at 3586,4499 h60
  text "Course Design" at 3729,4404 h60
  text "Schematic: LHT, GXC, CXJ" at 3759,4182 h60
  text "PCB: CXJ" at 4097,4057 h60
  text "Designed time: Sept. 2010" at 3766,3740 h60

## Dimensions
2415,3110 to 13390,3110 on Mechanical 1
2415,3110 to 2415,7400 on Mechanical 1

## Text inside footprints (layer, text, board x,y; h text height)
C11: Top Overlay "+" at 3170.47,4633.03 h59.06 r270
C15: Top Overlay "+" at 12779,3619 h59.06 r270
C16: Top Overlay "+" at 12529,3229 h59.06 r180
C17: Top Overlay "+" at 12679,3659 h59.06 r90
C18: Top Overlay "+" at 12679,3879 h59.06 r90
C19: Top Overlay "+" at 3525,3440 h59.06 r90
C21: Top Overlay "+" at 5430,3878 h59.06 r270
C23: Top Overlay "+" at 12784,3369 h59.06 r270
DS1: Top Overlay "+" at 8669,4540 h59.06 r270
DS2: Top Overlay "+" at 8409,4540 h59.06 r270
DS3: Top Overlay "+" at 8149,4540 h59.06 r270
DS4: Top Overlay "+" at 2690,5005 h59.06 r270
J1: Top Overlay "10" at 6273,3174 h50; Top Overlay "9" at 6318,3276 h50; Top Overlay "1" at 6902,3287 h50; Top Overlay "2" at 6902,3176 h50
P1: Top Overlay "1" at 12873.06,3946.95 h59.06 r270; Top Overlay "5" at 12873.06,3520.57 h59.06 r270; Top Overlay "9" at 13243.13,3575.1 h59.06 r270; Top Overlay "6" at 13243.13,3902.27 h59.06 r270